# Altium PCB LAD_PCB.PcbDoc (part 2 of 2)
Units mil, origin at the board's own origin, x right, y up, seen from the top; angles counter-clockwise.
Board outline 2160 x 3165 mil, 2 copper layers (Top Layer, Bottom Layer); 66 components, 38 nets, 236 pads, 61 vias.
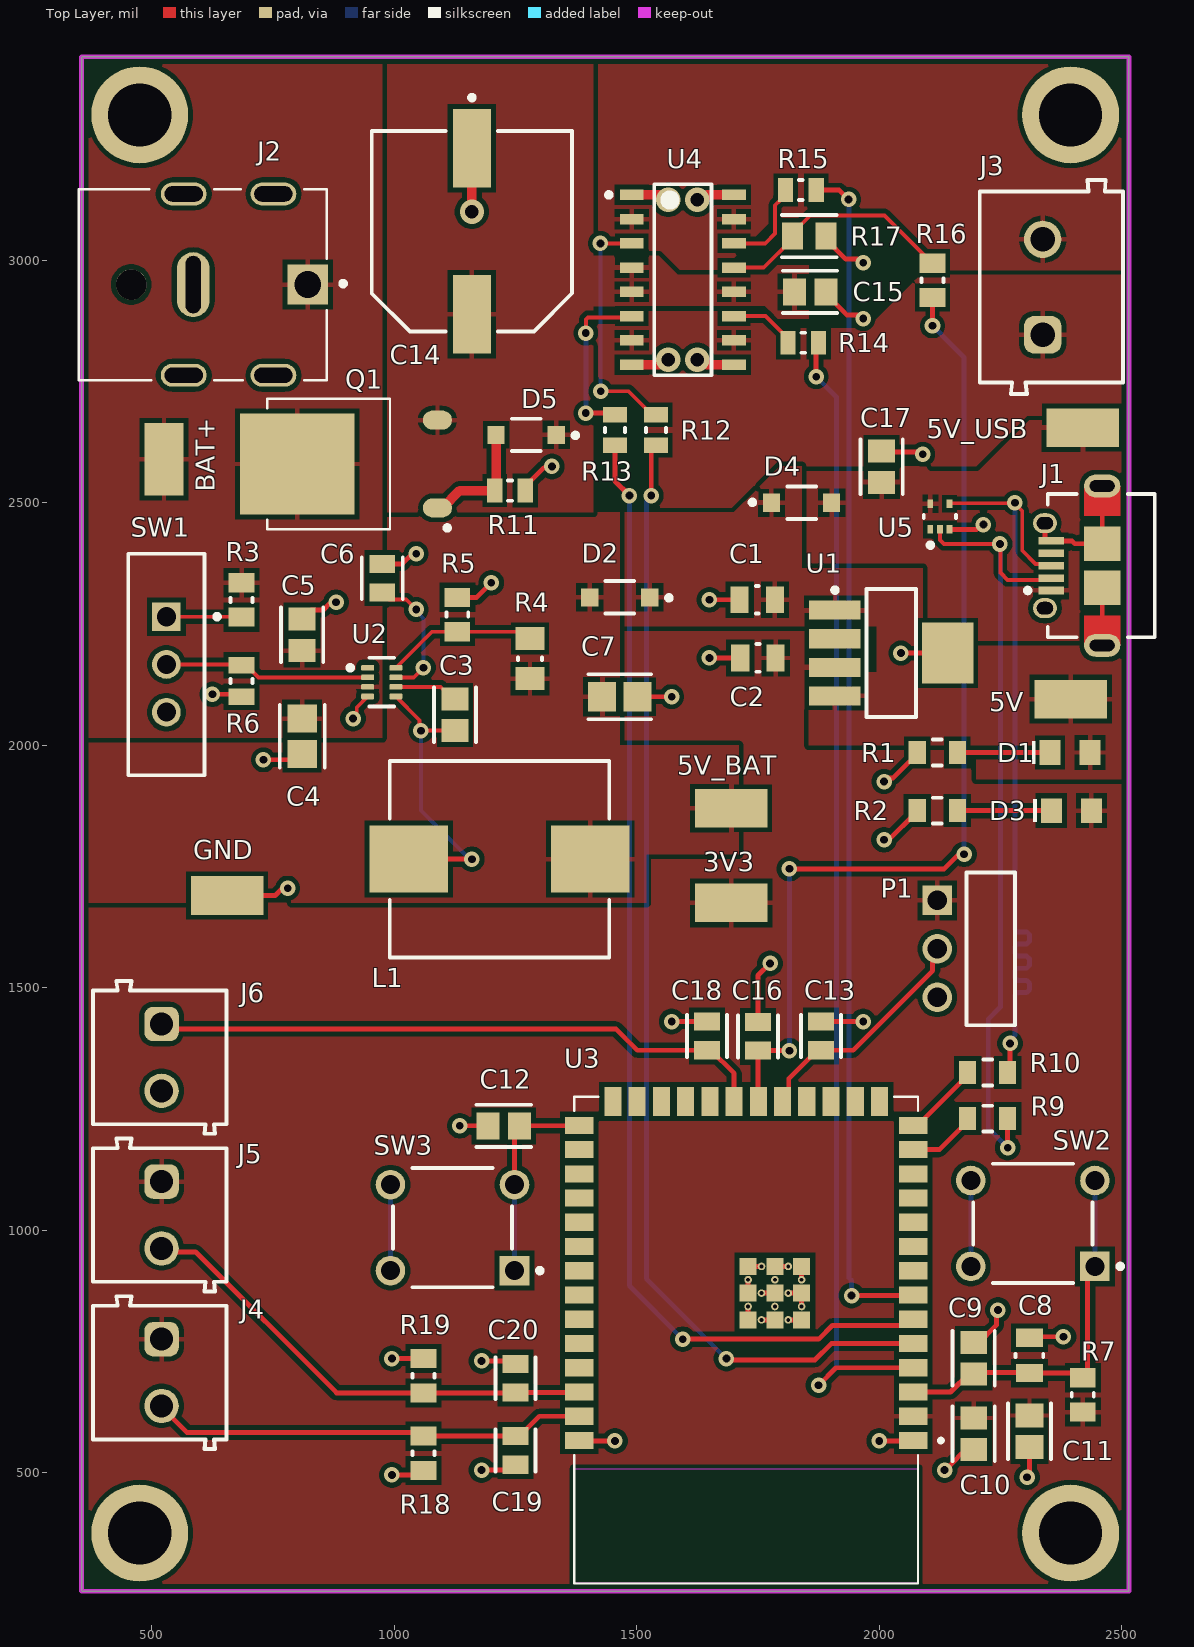
[diagram p0: Top Layer view]

## Polygon pours and split planes (outlines as drawn)
5V_USB on Top Layer "5V_USB_L01_P019" (solid, pour order 19): 1840,2575 2200,2575 2305,2680 2515,2680 2515,2205 2090,2205 2090,2365 1840,2365
5V on Top Layer "5V_L01_P010" (solid, pour order 10): 1465,2480 1700,2480 1795,2575 1840,2575 1840,2365 2090,2365 2090,2205 2515,2205 2515,1925 2510,1930 2200,1930 2200,2000 1855,2000 1855,2150 1995,2150 1995,2245 1465,2245
MOTOR_POS on Top Layer "MOTOR_POS_L01_P014" (solid, pour order 14): 1410,3420 1410,3010 1545,3010 1585,2970 1665.71,2970 1780.71,3085 2015,3085 2120,2980 2515,2980 2515,3420
MOTOR_NEG on Top Layer "MOTOR_NEG_L01_P018" (solid, pour order 18): 1410,2905 1410,2770 1520,2660 1520,2480 1700,2480 1795,2575 2200,2575 2305,2680 2515,2680 2515,2980 2095,2980 1975,2860 1810,2860 1765,2905
VCC_MOTOR on Top Layer "VCC_MOTOR_L01_P002" (solid, pour order 2): 975,3420 1410,3420 1410,3010 1545,3010 1585,2970 1770,2970 1790,2990 1855,2990 1855,2880 1790,2880 1765,2905 1410,2905 1410,2480 975,2480
3V3 on Top Layer "3V3_L01_P011" (solid, pour order 11): 355,1675 1520,1675 1520,1775 1710,1775 1710,2000 1465,2000 1465,2245 1995,2245 1995,2150 1855,2150 1855,2000 2200,2000 2200,1930 2510,1930 2515,1925 2515,255 355,255
5V_BAT on Top Layer "5V_BAT_L01_P007" (solid, pour order 7): 975,2480 1465,2480 1465,2000 1710,2000 1710,1775 1520,1775 1520,1675 345,1675 345,2015 975,2015
BAT+ on Top Layer "BAT+_L01_P001" (solid, pour order 1): 355,3420 355,2015 975,2015 975,3420
GND on Bottom Layer "GND_L02_P000" (solid, pour order 0): 355,255 2515,255 2515,3420 355,3420

## Keep-outs
Keep-Out Layer:
  the board outline again, w10

## Silkscreen, mask and mechanical layers (free items; w line width, h text height)
Mechanical 2:
  the board outline again, w10

## Dimensions
355,255 to 355,3420 on Mechanical 1
355,3420 to 2515,3420 on Mechanical 1

## Text inside footprints (layer, text, board x,y; h text height)
J1: Mechanical 1 "PCB EDGE" at 2580,2580.55 h39.37 r90
U3: Mechanical 13 "ANTENNA" at 1902.99,399.02 h50 r180